# Altium PCB FastTrig_board.PcbDoc
Units mm, origin at the board's own origin, x right, y up, seen from the top; angles counter-clockwise.
Board outline 130 x 120 mm, 3 copper layers (Top Layer, Mid-Layer 1, Bottom Layer); 69 components, 65 nets, 427 pads, 118 vias.
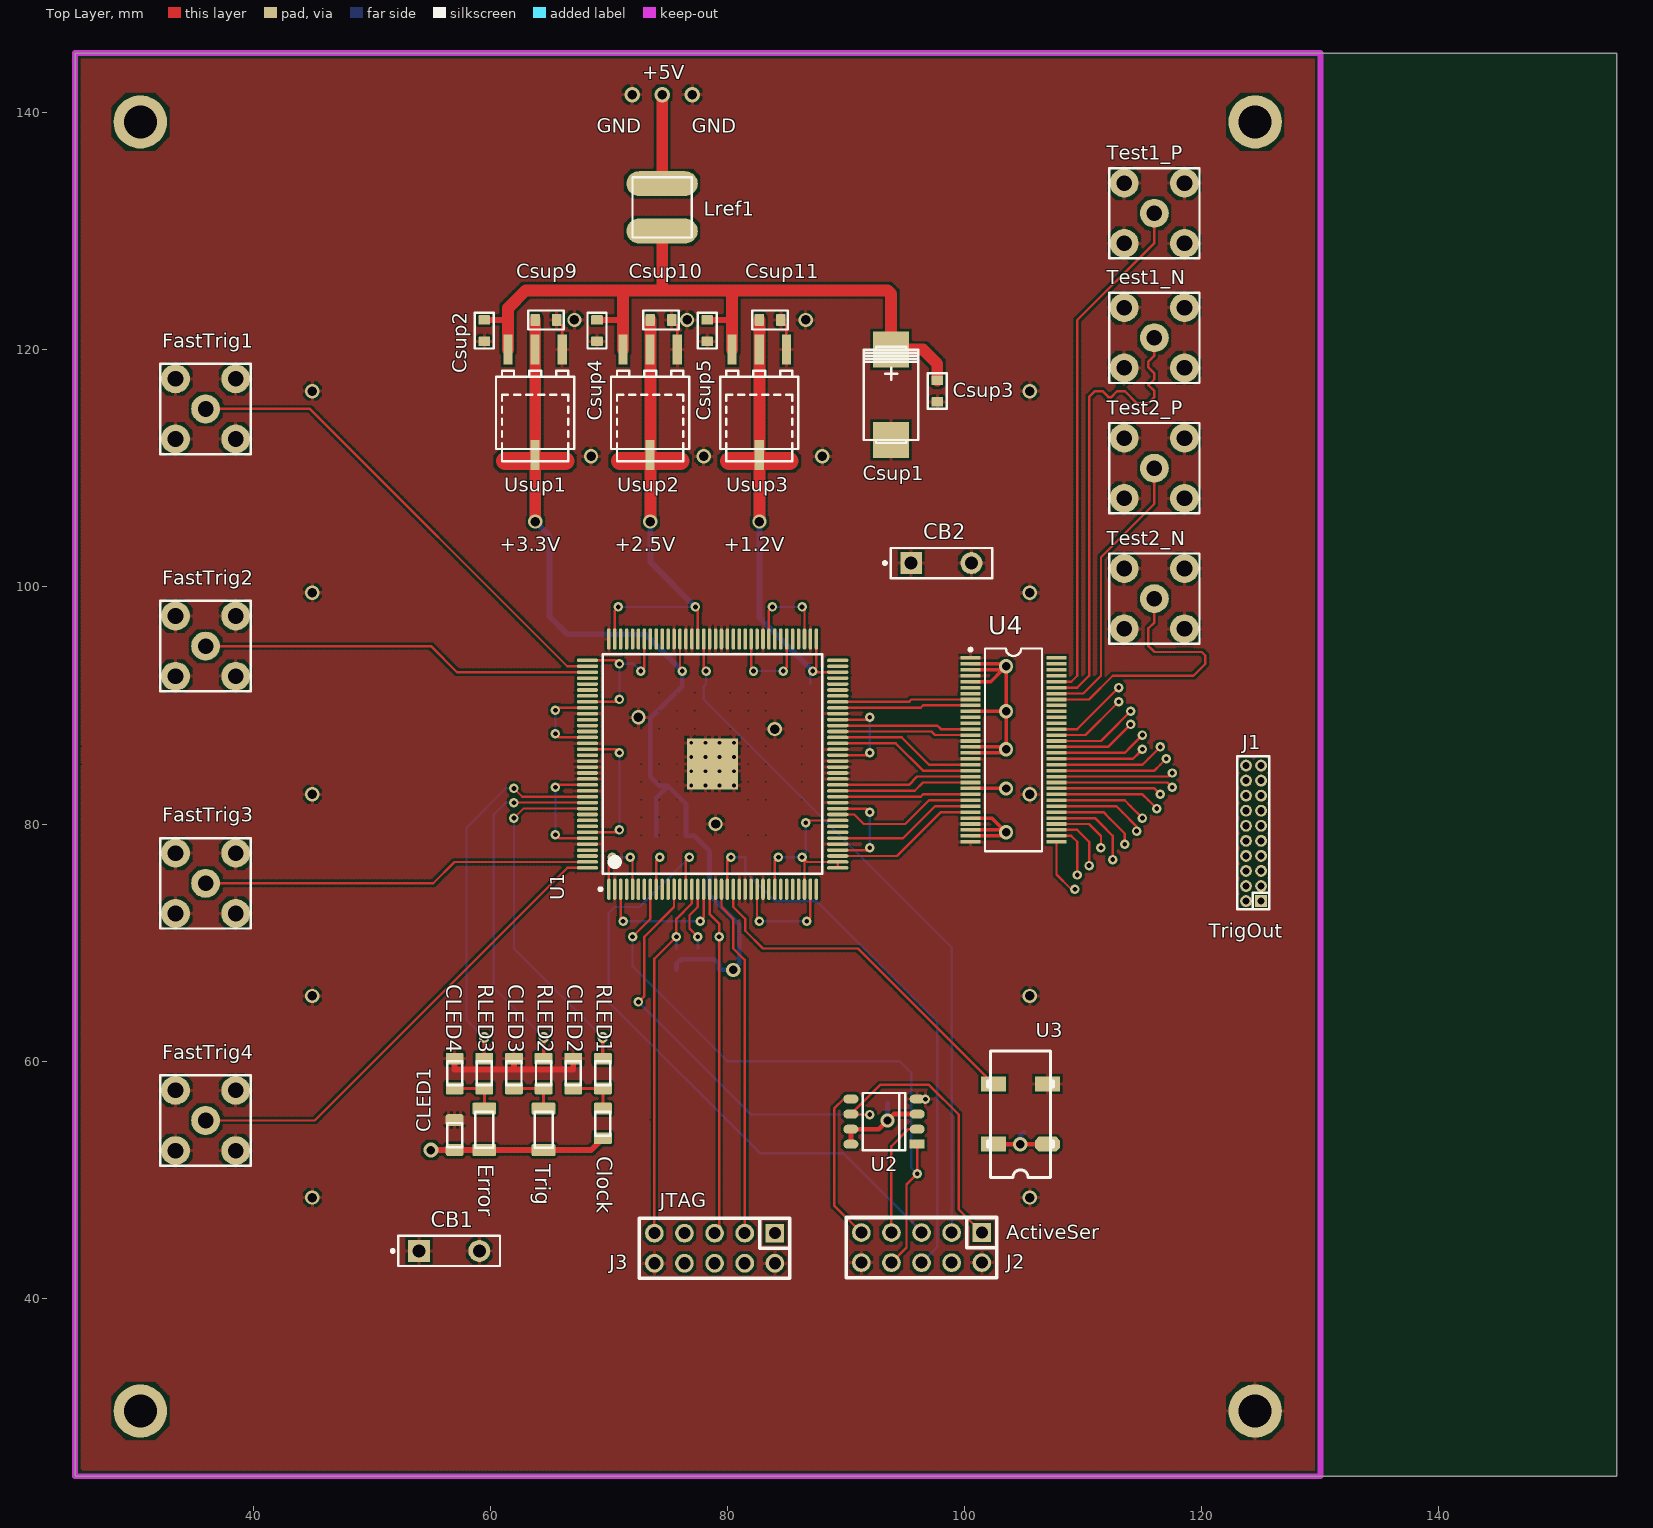
[diagram p0: Top Layer view]
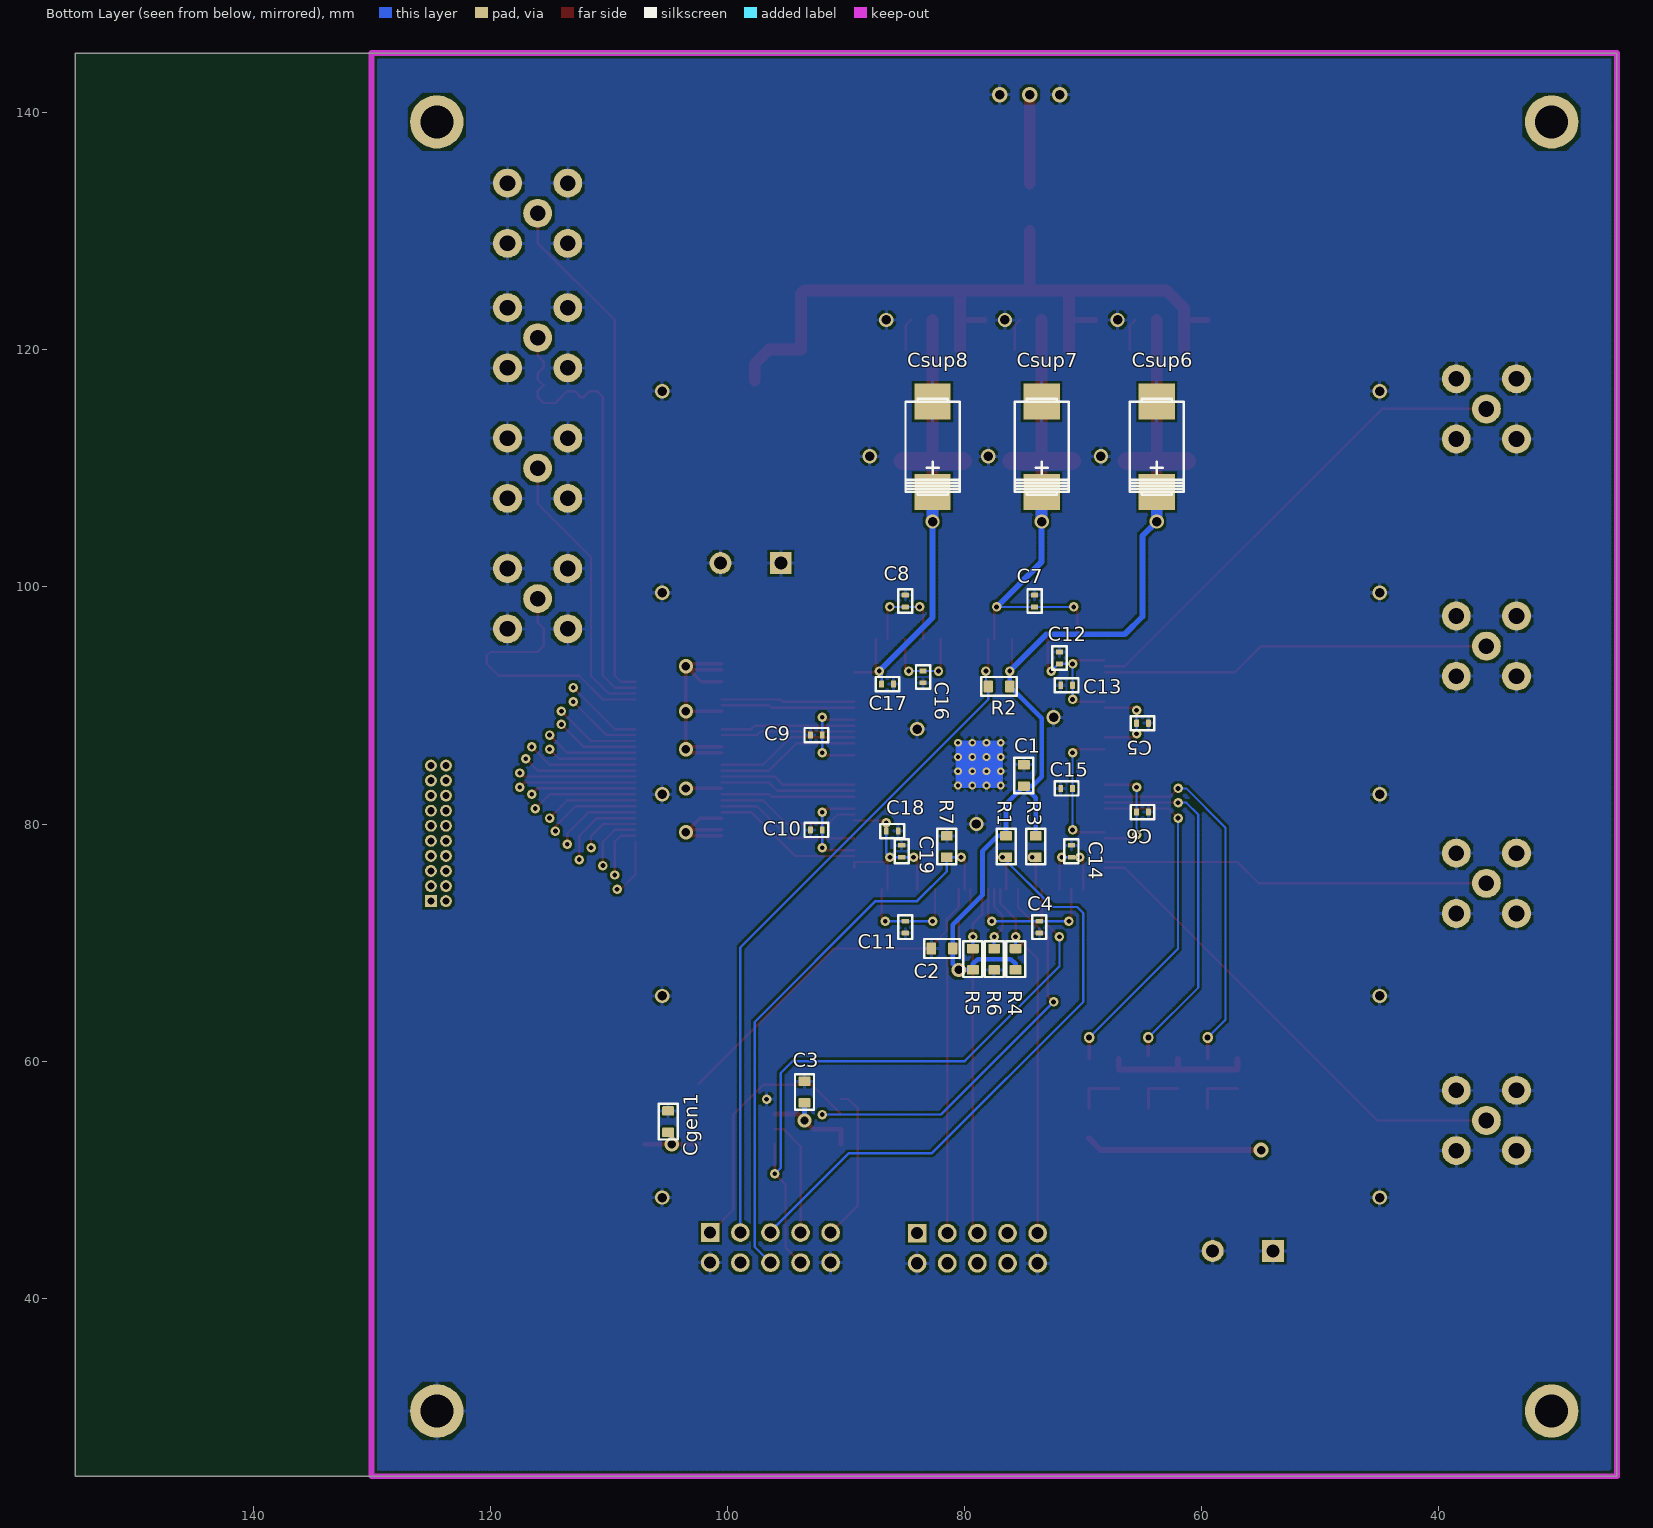
[diagram p1: Bottom Layer view, seen from below]
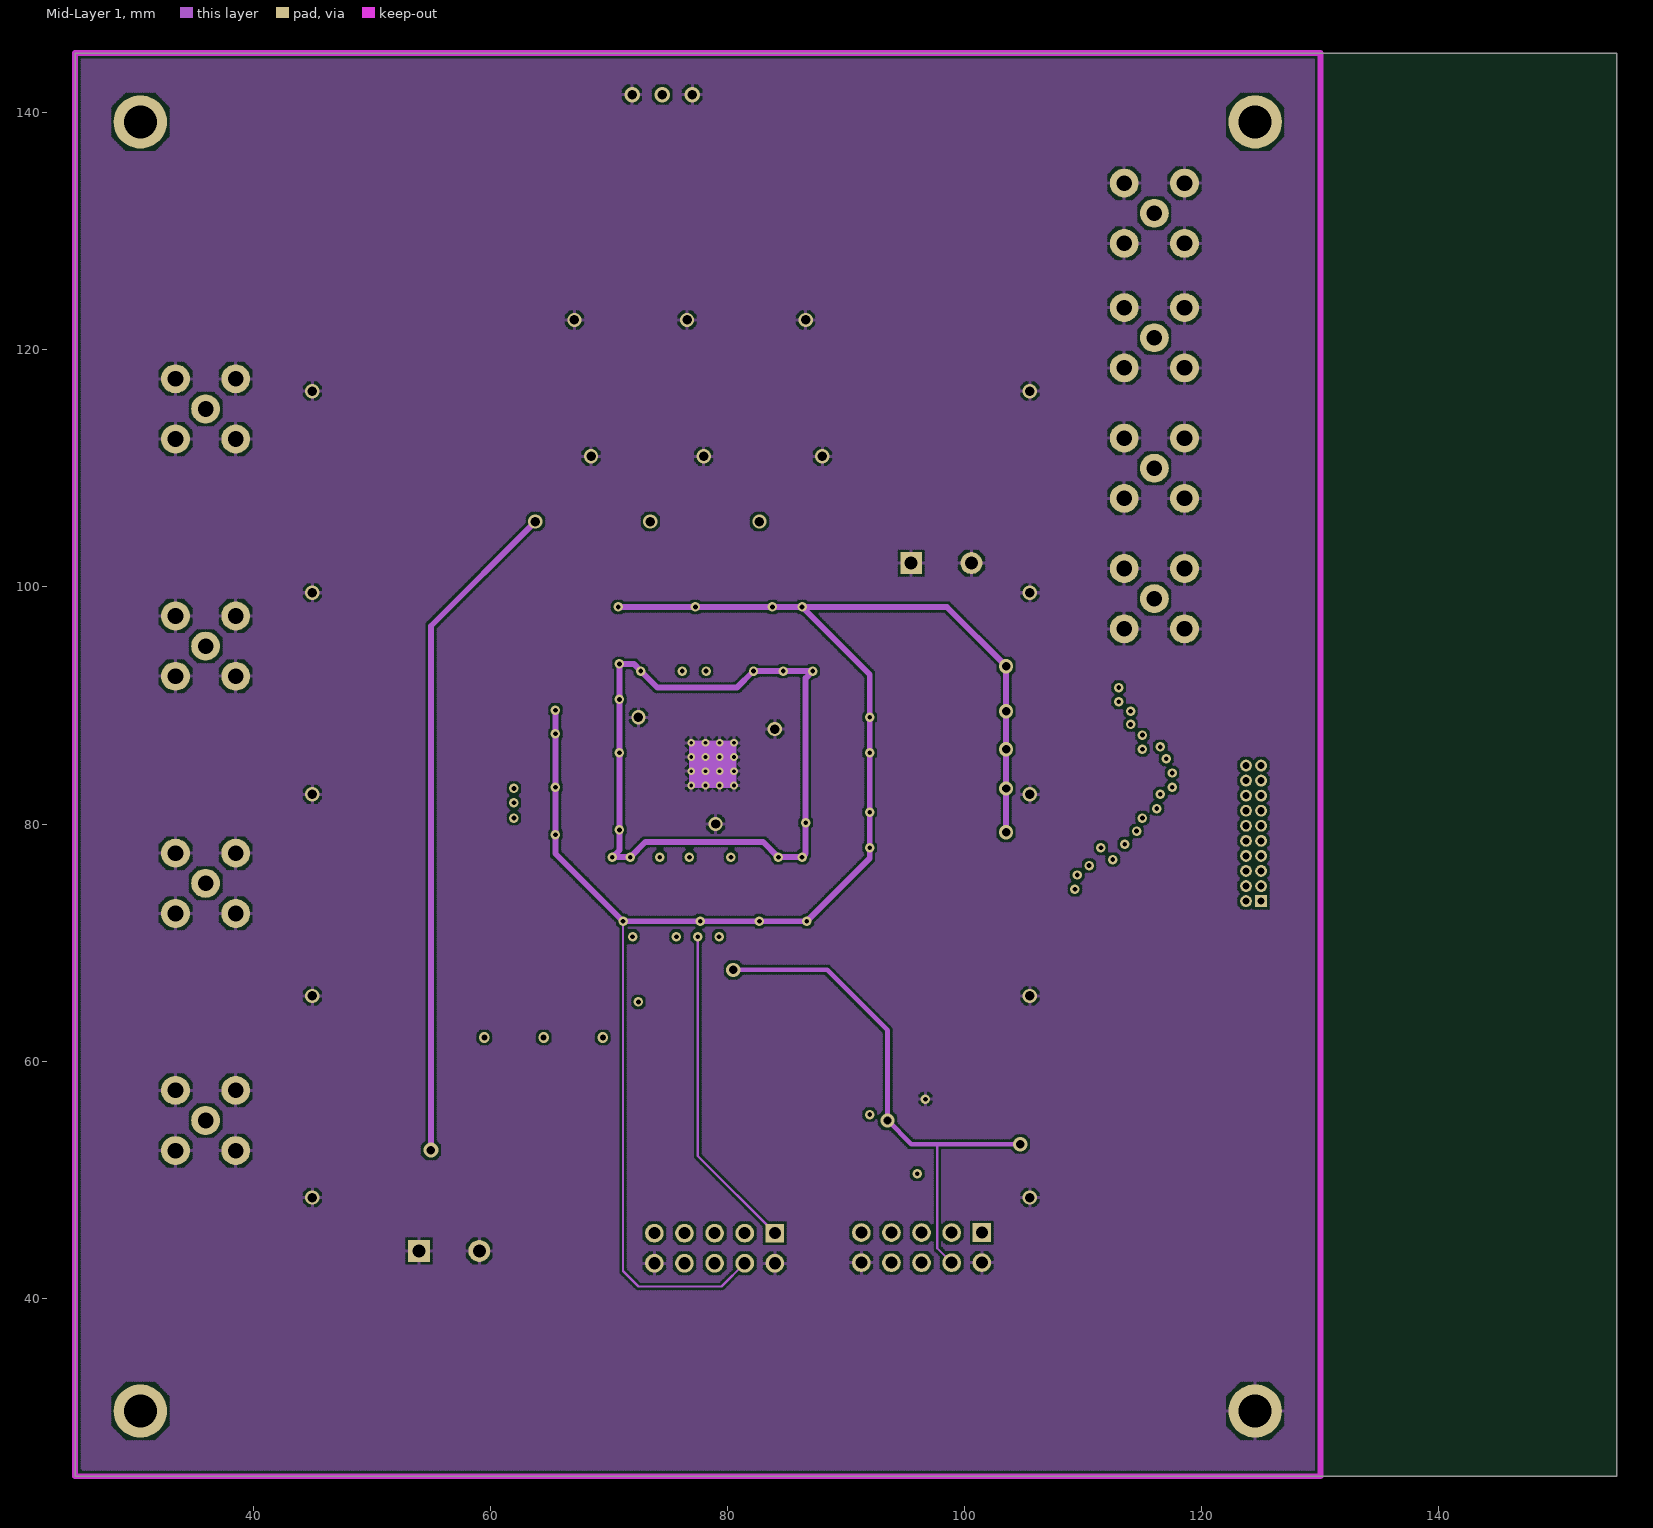
[diagram p2: Mid-Layer 1]

## Layer stack, top to bottom
Top Layer: signal copper 0.0356
Dielectric: core 0.32, FR-4, Dk 4.8
Mid-Layer 1: signal copper 0.0356
Dielectric: prepreg 0.32, FR-4, Dk 4.8
Bottom Layer: signal copper 0.0356

## Board outline
25,25 25,145 155,145 155,25

## Design rules (kind name [scope] priority, off if disabled: settings)
Clearance [All] p1: gap=0.2
DiffPairsRouting [All] p1: maxlimit=0.5 minlimit=0.15 mostfreqgap=0.2 maxuncoupledlength=12.7
PolygonConnect [All] p1: connectstyle=Relief reliefconductorwidth=0.254 reliefentries=4 polygonreliefangle="90 Angle"
RoomDefinition FastTrig_Board [InComponentClass('FastTrig_Board')] p1: confinementstyle=ConfineIn formatcopy=TRUE lockcomponents=FALSE outline 156,25 233.978,25 233.978,80.626 156,80.626
RoutingVias [All] p1: holewidth=0.4 width=0.8 viastyle="Through Hole" minholewidth=0.25 minwidth=0.5 maxholewidth=1.5 maxwidth=2
SilkscreenOverComponentPads [All] p1: minsilkscreentomaskgap=0.254
SolderMaskExpansion [All] p1: expansion=0.102
Width [All] p1: maxlimit=1.5 minlimit=0.15 preferedwidth=0.2 minimp=50.000000 maximp=50.000000 favimp=50.000000
26 further rules are at their usual default settings.

## Classes and differential pairs
differential pair TRIGOUT1: +TRIGOUT1_P -TRIGOUT1_N
differential pair TRIGOUT2: +TRIGOUT2_P -TRIGOUT2_N
differential pair TRIGOUT3: +TRIGOUT3_P -TRIGOUT3_N
differential pair TRIGOUT4: +TRIGOUT4_P -TRIGOUT4_N
differential pair TRIGOUT5: +TRIGOUT5_P -TRIGOUT5_N
differential pair TRIGOUT6: +TRIGOUT6_P -TRIGOUT6_N
differential pair TRIGOUT7: +TRIGOUT7_P -TRIGOUT7_N
differential pair TEST1: +TEST1_P -TEST1_N
differential pair TEST2: +TEST2_P -TEST2_N
differential pair TRIGOUT8: +TRIGOUT8_P -TRIGOUT8_N
differential pair TRIGOUT9: +TRIGOUT9_P -TRIGOUT9_N
differential pair TRIGOUT10: +TRIGOUT10_P -TRIGOUT10_N

## Components (designator, comment, footprint, x,y, rotation, side; value= is the part's Value field where it differs from the comment)
C1 "0.1uF" chip0603 75,85 r270 bottom
C2 "0.1uF" chip0603 82.8,69.5 r180 bottom
C3 "2.2uF" chip0603 93.5,56.5 r90 bottom
C4 "0.1uF" chip0402 73.7,70.8 r90 bottom
C5 "0.1uF" chip0402 64.5,88.5 r0 bottom
C6 "0.1uF" chip0402 64.5,81 r0 bottom
C7 "0.1uF" chip0402 74.1,99.3 r270 bottom
C8 "0.1uF" chip0402 85,99.3 r270 bottom
C9 "0.1uF" chip0402 93,87.5 r180 bottom
C10 "0.1uF" chip0402 93,79.5 r180 bottom
C11 "0.1uF" chip0402 85,70.8 r90 bottom
C12 "0.1uF" chip0402 72,94.5 r270 bottom
C13 "0.1uF" chip0402 71.9,91.7 r180 bottom
C14 "0.1uF" chip0402 71,78.2 r270 bottom
C15 "0.1uF" chip0402 71.9,83 r180 bottom
C16 "0.1uF" chip0402 83.5,91.9 r90 bottom
C17 "0.1uF" chip0402 86,91.8 r0 bottom
C18 "0.1uF" chip0402 85.6,79.4 r0 bottom
C19 "0.1uF" chip0402 85.3,78.2 r270 bottom
CB1 "Circuit Breaker" SPST-2 56.54,44 r0 top
CB2 "Circuit Breaker" SPST-2 98.04,102 r0 top (schematic designator CB1)
Cgen1 "0.1uF" chip0603 105,55.8 r270 bottom
CLED1 "0.1M" chip0805#1 57,52.5 r90 top
CLED2 "0.1M" chip0805#2 67,57.706 r90 top
CLED3 "0.1M" chip0805#2 62,57.706 r90 top
CLED4 "0.1M" chip0805#2 57,57.706 r90 top
Clock "LED" CHIP0805 69.5,56 r270 top (schematic designator VDLED2)
Csup1 "100uF" CEL-SMD300 93.8,120 r270 top
Csup2 "0.47uF" chip0603 59.5,122.5 r270 top
Csup3 "0.47uF" chip0603 97.7,117.4 r270 top
Csup4 "0.47uF" chip0603 69,122.5 r270 top
Csup5 "0.47uF" chip0603 78.3,122.5 r270 top
Csup6 "100uF" CEL-SMD300 63.8,108 r90 bottom
Csup7 "100uF" CEL-SMD300 73.5,108 r90 bottom
Csup8 "100uF" CEL-SMD300 82.7,108 r90 bottom
Csup9 "0.47uF" chip0603 63.8,122.5 r0 top
Csup10 "0.47uF" chip0603 73.5,122.5 r0 top
Csup11 "0.47uF" chip0603 82.7,122.5 r0 top
Error "LED" CHIP1206 59.5,56 r270 top (schematic designator VDLED3)
FastTrig1 "LEMO" LEMO 36,115 r90 top
FastTrig2 "LEMO" LEMO 36,95 r90 top
FastTrig3 "LEMO" LEMO 36,75 r90 top
FastTrig4 "LEMO" LEMO 36,55 r90 top
J1 "TrigOut" IDC-20_2x10_1.27 125,73.5 r90 top
J2 "ActiveSer" IDC10 101.45,45.55 r180 top
J3 "JTAG" IDC10 84,45.5 r180 top
Lref1 "100mkH" SDR0604 74.5,132 r270 top
R1 "10k" chip0603 76.5,79 r270 bottom
R2 "10k" chip0603 76.2,91.6 r0 bottom
R3 "10k" chip0603 74,79 r270 bottom
R4 "10k" chip0603 75.7,67.7 r90 bottom
R5 "10k" chip0603 79.3,67.7 r90 bottom
R6 "1k" chip0603 77.5,67.7 r90 bottom
R7 "10k" chip0603 81.5,77.2 r90 bottom
RLED1 "200" chip0805#2 69.5,57.706 r90 top
RLED2 "300" chip0805#2 64.5,57.706 r90 top
RLED3 "300" chip0805#2 59.5,57.706 r90 top
Test1_N "LEMO" LEMO 116,121 r0 top
Test1_P "LEMO" LEMO 116,131.5 r0 top
Test2_N "LEMO" LEMO 116,99 r0 top
Test2_P "LEMO" LEMO 116,110 r0 top
Trig "LED" CHIP1206 64.5,56 r270 top (schematic designator VDLED1)
U1 "EP3C16E144C8N" EQFP144_N 78.75,85.05 r90 top
U2 "EPCS4SI8" 8SO200 96,53 r90 top
U3 "40MHz" SG-636 107,53 r180 top
U4 "SN65LVDS387" DGG064 104.125,86.25 r270 top
Usup1 "NCP1117-3.3V" TO-252 63.786,120 r180 top
Usup2 "LD1117-2.5V" TO-252 73.486,120 r180 top
Usup3 "LD1117-1.2" TO-252 82.686,120 r180 top

## Footprints (in the part's own frame and the unit in brackets; to place one, negate y for a bottom-side part, rotate by r counter-clockwise, add the part's x,y. Pads: shape width x height; smd on the part's side, far side on the other; paste and mask are expansions set on the pad)
8SO200 [mil]
  rect 30x50 smd: 1(0,0)
  oval 30x50 smd: 2(50,0) 3(100,0) 4(150,0) 5(150,220) 6(100,220) 7(50,220) 8(0,220)
  silkscreen extent -20,40 170,180
CEL-SMD300 [mil]
  rect 120x120 smd: +(0,0) -(300,0)
  silkscreen extent -10,-90 310,90
chip0402 [mm]
  rrect20% 0.4x0.6 smd: 1(0,0) 2(1,0)
  silkscreen extent -0.5,-0.6 1.5,0.6
chip0603 [mm]
  rrect20% 0.8x1 smd: 1(0,0) 2(1.8,0)
  silkscreen extent -0.6,-0.8 2.4,0.8
chip0805#1 [mil]
  oval 20x60 smd: 1(-10,0) 1(0,0) 1(10,0) 2(90,0) 2(100,0) 2(110,0)
  oval 40x20 smd: 1(0,20) 1(0,-20) 2(100,-20) 2(100,20)
  silkscreen extent 10,-25 90,25
chip0805#2 [mil]
  rrect20% 39.37x59.06 smd: 1(0,0) 2(98.43,0)
  silkscreen extent 10,-25 90,25
CHIP0805 [mm]
  rrect20% 1x1.5 smd: 1(0,0) 2(2.5,0)
  silkscreen extent 0.25,-0.63 2.29,0.64
CHIP1206 [mm]
  rrect20% 1x2 smd: 1(0,0) 2(3.5,0)
  silkscreen extent 0.25,-0.76 3.3,0.76
DGG064 [mm] "Shrink Small Outline; 64 Leads; Body Width 6.1 mm; Pitch 0.5 mm"
  rect 0.3x1.65 smd: 1(-7.75,-3.625) 2(-7.25,-3.625) 3(-6.75,-3.625) 4(-6.25,-3.625) 5(-5.75,-3.625) 6(-5.25,-3.625) 7(-4.75,-3.625) 8(-4.25,-3.625) 9(-3.75,-3.625) 10(-3.25,-3.625) 11(-2.75,-3.625) 12(-2.25,-3.625) 13(-1.75,-3.625) 14(-1.25,-3.625) 15(-0.75,-3.625) 16(-0.25,-3.625) 17(0.25,-3.625) 18(0.75,-3.625) 19(1.25,-3.625) 20(1.75,-3.625) 21(2.25,-3.625) 22(2.75,-3.625) 23(3.25,-3.625) 24(3.75,-3.625) 25(4.25,-3.625) 26(4.75,-3.625) 27(5.25,-3.625) 28(5.75,-3.625) 29(6.25,-3.625) 30(6.75,-3.625) 31(7.25,-3.625) 32(7.75,-3.625) 33(7.75,3.625) 34(7.25,3.625) 35(6.75,3.625) 36(6.25,3.625) 37(5.75,3.625) 38(5.25,3.625) 39(4.75,3.625) 40(4.25,3.625) 41(3.75,3.625) 42(3.25,3.625) 43(2.75,3.625) 44(2.25,3.625) 45(1.75,3.625) 46(1.25,3.625) 47(0.75,3.625) 48(0.25,3.625) 49(-0.25,3.625) 50(-0.75,3.625) 51(-1.25,3.625) 52(-1.75,3.625) 53(-2.25,3.625) 54(-2.75,3.625) 55(-3.25,3.625) 56(-3.75,3.625) 57(-4.25,3.625) 58(-4.75,3.625) 59(-5.25,3.625) 60(-5.75,3.625) 61(-6.25,3.625) 62(-6.75,3.625) 63(-7.25,3.625) 64(-7.75,3.625)
  silkscreen extent -8.57,-3.75 8.55,2.4
EQFP144_N [mm] "Thin QFP, 144-Leads, Body 20x20mm, Pitch 0.5mm, IPC Medium Density"
  oval 1.8x0.3 smd: 1(-10.55,8.75) 2(-10.55,8.25) 3(-10.55,7.75) 4(-10.55,7.25) 5(-10.55,6.75) 6(-10.55,6.25) 7(-10.55,5.75) 8(-10.55,5.25) 9(-10.55,4.75) 10(-10.55,4.25) 11(-10.55,3.75) 12(-10.55,3.25) 13(-10.55,2.75) 14(-10.55,2.25) 15(-10.55,1.75) 16(-10.55,1.25) 17(-10.55,0.75) 18(-10.55,0.25) 19(-10.55,-0.25) 20(-10.55,-0.75) 21(-10.55,-1.25) 22(-10.55,-1.75) 23(-10.55,-2.25) 24(-10.55,-2.75) 25(-10.55,-3.25) 26(-10.55,-3.75) 27(-10.55,-4.25) 28(-10.55,-4.75) 29(-10.55,-5.25) 30(-10.55,-5.75) 31(-10.55,-6.25) 32(-10.55,-6.75) 33(-10.55,-7.25) 34(-10.55,-7.75) 35(-10.55,-8.25) 36(-10.55,-8.75) 73(10.55,-8.75) 74(10.55,-8.25) 75(10.55,-7.75) 76(10.55,-7.25) 77(10.55,-6.75) 78(10.55,-6.25) 79(10.55,-5.75) 80(10.55,-5.25) 81(10.55,-4.75) 82(10.55,-4.25) 83(10.55,-3.75) 84(10.55,-3.25) 85(10.55,-2.75) 86(10.55,-2.25) 87(10.55,-1.75) 88(10.55,-1.25) 89(10.55,-0.75) 90(10.55,-0.25) 91(10.55,0.25) 92(10.55,0.75) 93(10.55,1.25) 94(10.55,1.75) 95(10.55,2.25) 96(10.55,2.75) 97(10.55,3.25) 98(10.55,3.75) 99(10.55,4.25) 100(10.55,4.75) 101(10.55,5.25) 102(10.55,5.75) 103(10.55,6.25) 104(10.55,6.75) 105(10.55,7.25) 106(10.55,7.75) 107(10.55,8.25) 108(10.55,8.75)
  oval 0.3x1.8 smd: 37(-8.75,-10.55) 38(-8.25,-10.55) 39(-7.75,-10.55) 40(-7.25,-10.55) 41(-6.75,-10.55) 42(-6.25,-10.55) 43(-5.75,-10.55) 44(-5.25,-10.55) 45(-4.75,-10.55) 46(-4.25,-10.55) 47(-3.75,-10.55) 48(-3.25,-10.55) 49(-2.75,-10.55) 50(-2.25,-10.55) 51(-1.75,-10.55) 52(-1.25,-10.55) 53(-0.75,-10.55) 54(-0.25,-10.55) 55(0.25,-10.55) 56(0.75,-10.55) 57(1.25,-10.55) 58(1.75,-10.55) 59(2.25,-10.55) 60(2.75,-10.55) 61(3.25,-10.55) 62(3.75,-10.55) 63(4.25,-10.55) 64(4.75,-10.55) 65(5.25,-10.55) 66(5.75,-10.55) 67(6.25,-10.55) 68(6.75,-10.55) 69(7.25,-10.55) 70(7.75,-10.55) 71(8.25,-10.55) 72(8.75,-10.55) 109(8.75,10.55) 110(8.25,10.55) 111(7.75,10.55) 112(7.25,10.55) 113(6.75,10.55) 114(6.25,10.55) 115(5.75,10.55) 116(5.25,10.55) 117(4.75,10.55) 118(4.25,10.55) 119(3.75,10.55) 120(3.25,10.55) 121(2.75,10.55) 122(2.25,10.55) 123(1.75,10.55) 124(1.25,10.55) 125(0.75,10.55) 126(0.25,10.55) 127(-0.25,10.55) 128(-0.75,10.55) 129(-1.25,10.55) 130(-1.75,10.55) 131(-2.25,10.55) 132(-2.75,10.55) 133(-3.25,10.55) 134(-3.75,10.55) 135(-4.25,10.55) 136(-4.75,10.55) 137(-5.25,10.55) 138(-5.75,10.55) 139(-6.25,10.55) 140(-6.75,10.55) 141(-7.25,10.55) 142(-7.75,10.55) 143(-8.25,10.55) 144(-8.75,10.55)
  rect 4.3x4.3 smd: 145(0,0)
  silkscreen extent -10.67,-9.25 9.25,9.57, body extent -10,-10 10,10, height 1.6
IDC10 [mil]
  rect 62x62 hole 40: 1(0,0)
  round 62 hole 40: 2(0,100) 3(100,0) 4(100,100) 5(200,0) 6(200,100) 7(300,0) 8(300,100) 9(400,0) 10(400,100)
  silkscreen extent -50,-50 450,150
IDC-20_2x10_1.27 [mm]
  rect 1x1 hole 0.6: 1(0,0)
  round 1 hole 0.6: 2(0,1.27) 3(1.27,0) 4(1.27,1.27) 5(2.54,0) 6(2.54,1.27) 7(3.81,0) 8(3.81,1.27) 9(5.08,0) 10(5.08,1.27) 11(6.35,0) 12(6.35,1.27) 13(7.62,0) 14(7.62,1.27) 15(8.89,0) 16(8.89,1.27) 17(10.16,0) 18(10.16,1.27) 19(11.43,0) 20(11.43,1.27)
  silkscreen extent -0.7,-0.7 12.2,2
LEMO [mil]
  round 96 hole 52: SHIELD(-100,-100) SHIELD(-100,100) SHIELD(100,-100) SHIELD(100,100) WIRE(0,0)
  silkscreen extent -150,-150 150,150
SDR0604 [mm]
  oval 2.1x6 smd: 1(-2,0) 2(2,0)
  silkscreen extent -2.55,-2.5 2.55,2.5
SG-636 [mil]
  oct 83x50 smd: 1(0,0)
  rect 83x50 smd: 2(0,-200) 3(180,-200) 4(180,0)
  silkscreen extent -20,-310 200,110
SPST-2 [mm] "Switch; 2 Leads"
  rect 1.85x1.85 hole 1.1: 1(-2.54,0)
  round 1.85 hole 1.1: 2(2.54,0)
  silkscreen extent -4.89,-1.27 4.28,1.27
TO-252 [mil]
  rect 30x100 smd: 1(-90,0) 2(0,0) 3(90,0) 4(0,350)
  Top Layer lines w60: 100,370 0,370 -0.55,370 -100,370
  silkscreen extent -130,70 130,370

## Part data
C1 C2 C3 C4 C5 C6 C7 C8 C9 C10 C11 C12 C13 C14 C15 C16 C17 C18 C19 Cgen1 CLED1 CLED2 CLED3 CLED4 Csup2 Csup3 Csup4 Csup5 Csup9 Csup10 Csup11: library part C
Clock Error Trig: library part AL307
Csup1 Csup6 Csup7 Csup8: library part "C POL"
J1: library part IDC-20_2x10_1.27
J2 J3: library part IDC-10
Lref1: library part DR
R1 R2 R3 R4 R5 R6 R7 RLED1 RLED2 RLED3: library part R
U1: "Cyclone III Family FPGA, 84 I/O Pins, 4 PLLs, 144-Pin EQFP, Speed Grade 8, Commercial Grade, Pb-Free"
U2: "EPCS4 Series, In-system programmable 3.3V serial configuration device, 8-Pin SOIC, 4-Megabit, Industrial Grade"
U3: library part SG-636, "Crystal Oscillator (SMD)"
Usup2 Usup3: library part NCP1117-3.3V

## Free pads (board coordinates)
  round 4.5 hole 2.8: 4(30.5,30.5) 4(30.5,139.2) 4(124.5,30.5) 4(124.5,139.2)

## Via types
v1: diameter 0.8, hole 0.4, Top Layer to Bottom Layer, 65 vias
v2: diameter 1.2, hole 0.8, Top Layer to Bottom Layer, 22 vias
v3: diameter 0.66, hole 0.33, Top Layer to Bottom Layer, tented top, 16 vias
v4: diameter 1.2, hole 0.7, Top Layer to Bottom Layer, 8 vias
v5: diameter 1.3, hole 0.8, Top Layer to Bottom Layer, 3 vias
v6: diameter 0.9, hole 0.5, Top Layer to Bottom Layer, tented top, 3 vias
v7: diameter 1.27, hole 0.711, Top Layer to Bottom Layer, 1 vias

## Nets (pads, with @x,y where several pads share a name; then routed paths per layer and width w, separated by ;. In a path a pad name is that pad's centre, name@x,y a point inside that pad or via, vN(x,y) a via of type N, cw(c..) or ccw(c..) an arc to the next point about the centre after c; other vN are vias at no path point)
"+1.2 V": C12.2 C13.2 C14.2 C15.2 C16.2 C17.2 C18.2 C19.2 Csup8.+ Csup11.1 U1.1 U1.5 U1.29 U1.34 U1.37 U1.38 U1.45 U1.70 U1.73 U1.78 U1.84 U1.102 U1.109 U1.116 U1.124 U1.138 Usup3.2 Usup3.4 | length 165.1
  Top Layer w0.2: U1.138 70.7,79.3 v1(70.9,79.5) ; U1.124 70.6,86.3 v1(70.9,86) ; U1.116 70.7,90.3 v1(70.9,90.5) ; U1.109 70.6,93.8 v1(70.9,93.5) ; U1.1 70,76.9 v1(70.3,77.2) ; v1(71.8,77.2) 72,77 U1.5 ; v1(72.7,92.9) 73,93.2 U1.102 ; U1.84 82,93.1 v1(82.2,92.9) ; U1.29 84,76.9 v1(84.3,77.2) ; v1(84.7,92.9) 85,93.2 U1.78 ; v1(86.3,77.2) v1@86.5,77 ; U1.34 v1@86.5,77 ; v1(86.6,80.1) 86.8,80.3 U1.45 ; U1.73 87.5,93.2 v1(87.2,92.9) 87.3,92.8 U1.70 ; U1.37 U1.38 86.7,76.8 v1@86.5,77
  Top Layer w1: v2(82.7,105.5) 82.7,110.602 Csup11.1
  Mid-Layer 1 w0.5: v1(70.3,77.2) 70.9,77.8 v1(70.9,79.5) v1(70.9,86) v1(70.9,90.5) v1(70.9,93.5) 72.1,93.5 v1(72.7,92.9) 74.1,91.5 80.8,91.5 v1(82.2,92.9) v1(84.7,92.9) v1(87.2,92.9) 86.6,92.3 v1(86.6,80.1) 86.6,77.5 v1(86.3,77.2) v1(84.3,77.2) 83,78.5 73.1,78.5 v1(71.8,77.2) v1(70.3,77.2)
  Bottom Layer w0.2: v1(70.3,77.2) v1(71.8,77.2) ; v1(70.9,79.5) v1(70.9,86) ; v1(70.9,90.5) v1(70.9,93.5) 72.1,93.5 v1(72.7,92.9) ; v1(82.2,92.9) v1(84.7,92.9) ; v1(84.3,77.2) 85.8,77.2 ; v1@86.1,77.5 85.8,77.2 ; v1(86.3,77.2) 85.8,77.2 ; 86.6,77.5 v1(86.6,80.1) ; C17.2 87,92.7 v1(87.2,92.9)
  Bottom Layer w0.5: v2(82.7,105.5) 82.7,97.4 v1(87.2,92.9)
  Bottom Layer w1: v2(82.7,105.5) Csup8.+
"+2.5 V": C4.2 C5.2 C6.2 C7.2 C8.2 C9.2 C10.2 C11.2 Csup7.+ Csup10.1 J3.4 U1.3 U1.17 U1.26 U1.35 U1.40 U1.47 U1.56 U1.62 U1.75 U1.81 U1.93 U1.107 U1.117 U1.122 U1.130 U1.139 U4.2 U4.3 U4.5 U4.10 U4.16 U4.17 U4.23 U4.28 U4.30 U4.31 Usup2.2 Usup2.4 | length 299.1
  Top Layer w0.2: v1(65.5,79.1) 65.8,78.8 U1.139 ; v1(65.5,83.1) 65.7,83.3 U1.130 ; v1(65.5,87.6) 65.8,87.3 U1.122 ; v1(65.5,89.6) 65.7,89.8 U1.117 ; U1.107 70.5,98 v1(70.8,98.3) ; U1.3 71,72 v1(71.2,71.8) ; v1(77.3,98.3) 77.5,98.1 U1.93 ; v1(77.7,71.8) 78,72.1 U1.17 ; U1.26 82.5,72 v1(82.7,71.8) ; U1.81 83.5,98 v1(83.8,98.3) ; v1(86.3,98.3) 86.5,98.1 U1.75 ; v1(86.7,71.8) 87,72.1 U1.35 ; U1.40 91.8,77.8 v1(92,78) ; U1.47 91.7,81.3 v1(92,81) ; U1.56 91.8,85.8 v1(92,86) ; U1.62 91.8,88.8 v1(92,89)
  Top Layer w0.3: U4.31 103.2,79 v4(103.5,79.3) v4@103.3,79.5 ; U4.30 v4@103.3,79.5 ; U4.28 102.3,80.5 v4@103.3,79.5 ; U4.23 v4(103.5,83) ; U4.17 103.2,86 v4(103.5,86.3) ; U4.16 103.3,86.5 v4(103.5,86.3) ; U4.10 v4(103.5,89.5) ; U4.5 102.2,92 v4@103.2,93 ; U4.3 v4@103.2,93 ; U4.2 103.3,93.5 v4(103.5,93.3) ; v4@103.2,93 v4(103.5,93.3) ; v4(103.5,86.3) v4(103.5,89.5) ; v4(103.5,89.5) v4(103.5,93.3)
  Top Layer w1: v2(73.5,105.5) 73.5,110.602 Csup10.1
  Mid-Layer 1 w0.2: v1(71.2,71.8) 71.2,42.3 72.5,41 79.5,41 J3.4
  Mid-Layer 1 w0.5: v1(65.5,89.6) v1(65.5,87.6) v1(65.5,83.1) v1(65.5,79.1) 65.5,77.5 v1(71.2,71.8) v1(77.7,71.8) v1(82.7,71.8) v1(86.7,71.8) 92,77.1 v1(92,78) v1(92,81) v1(92,86) v1(92,89) 92,92.6 v1(86.3,98.3) ; v1(70.8,98.3) v1(77.3,98.3) v1(83.8,98.3) v1(86.3,98.3) ; v4(103.5,79.3) v4(103.5,86.3) v4(103.5,93.3) 98.5,98.3 v1(86.3,98.3)
  Bottom Layer w0.2: v1(65.5,79.1) v1(65.5,83.1) ; v1(65.5,87.6) v1(65.5,89.6) ; v1(70.8,98.3) C7.2 v1(77.3,98.3) ; v1(71.2,71.8) v1(77.7,71.8) ; v1(82.7,71.8) v1(86.7,71.8) ; v1(83.8,98.3) C8.2 v1(86.3,98.3) ; v1(92,78) C10.2 v1(92,81) ; v1(92,86) C9.2 v1(92,89)
  Bottom Layer w0.5: v2(73.5,105.5) 73.5,102.1 v1(77.3,98.3)
  Bottom Layer w1: v2(73.5,105.5) Csup7.+
"+3.3 V": C1.2 C2.2 C3.1 Cgen1.2 CLED1.1 Csup6.+ Csup9.1 J2.4 R1.1 R2.1 R3.1 R4.1 R5.1 U1.96 U2.3 U2.7 U2.8 U3.1 U3.4 Usup1.2 Usup1.4 | length 216.5
  Top Layer w0.2: U1.96 76,93.1 v1(76.2,92.9)
  Top Layer w0.4: U2.8 U2.7 92.77,54.27 94.04,55.54 U2.3 ; U3.4 v4(104.7,53) U3.1
  Top Layer w0.5: v7(55,52.5) 68.5,52.5 69.5,53.5
  Top Layer w1: v2(63.8,105.5) 63.8,110.602 Csup9.1
  Mid-Layer 1 w0.2: 97.7,53 97.7,44.22 J2.4
  Mid-Layer 1 w0.4: v4(80.5,67.7) 88.4,67.7 93.5,62.6 v4(93.5,55) 95.5,53 97.7,53 v4(104.7,53)
  Mid-Layer 1 w0.5: v7(55,52.5) 55,96.7 v2(63.8,105.5)
  Bottom Layer w0.4: R3.1 74,82.2 C1.2 ; R4.1 75.7,68.2 76.1,68.6 78.9,68.6 79.3,68.2 R5.1 v4(80.5,67.7) 81,68.2 C2.2 81,71.5 78.5,74 78.5,77.7 77.2,79 R1.1 76.5,81.7 C1.2 ; v1(76.2,92.9) R2.1 73.5,88.9 73.5,84 74.3,83.2 C1.2 ; v4(93.5,55) C3.1 ; v4(104.7,53) 104.7,53.7 Cgen1.2
  Bottom Layer w0.5: v2(63.8,105.5) 65,104.3 65,97.5 66.5,96 73.1,96 v1(76.2,92.9)
  Bottom Layer w1: v2(63.8,105.5) Csup6.+
"+5 V": Csup1.+ Csup2.1 Csup3.1 Csup4.1 Csup5.1 Lref1.2 Usup1.3 Usup2.3 Usup3.3 | length 68
  Top Layer w0.5: Csup2.1 61.5,122.5 ; Csup4.1 71,122.5 ; Csup5.1 80.3,122.5
  Top Layer w1: Usup1.3 61.5,122.5 61.5,123.5 63,125 74.5,125 ; Usup2.3 71.2,125 ; Lref1.2 74.5,125 ; Usup3.3 80.4,125 ; Csup3.1 97.7,118.8 96.5,120 Csup1.+ 93.8,124.7 93.5,125 80.4,125 ; 74.5,125 80.4,125
"+5IN V": Lref1.1 | length 7.5
  Top Layer w1: Lref1.1 v5(74.5,141.5)
"AS ASD": J2.9 U2.5 | length 13.1
  Top Layer w0.2: U2.5 89.81,56.81 89,56 89,47.84 J2.9
"AS DATA": J2.7 U2.2 | length 10
  Top Layer w0.2: J2.7 93.83,52.83 95.27,54.27 U2.2
"AS DCLK": J2.1 U1.12 U2.6 | length 57.7
  Top Layer w0.2: v1(72.5,65) 73,65.5 73,70.5 75.5,73 U1.12 ; v1(92,55.5) 90.452,55.5 U2.6 92.872,58 97,58 99.5,55.5 99.5,47.5 J2.1
  Bottom Layer w0.2: v1(72.5,65) 82,55.5 v1(92,55.5)
"AS NCE": J2.6 R7.1 U1.21 | length 47.5
  Top Layer w0.2: U1.21 80,76.9 v1(80.3,77.2)
  Bottom Layer w0.2: v1(80.3,77.2) R7.1 81.5,76 84,73.5 87.5,73.5 97.7,63.3 97.7,44.34 J2.6
"AS NCS": J2.8 U1.8 U2.1 | length 53.9
  Top Layer w0.2: v1(72,70.5) 73.5,72 U1.8 ; J2.8 95.1,44.28 95.1,49.6 v1(96,50.5) U2.1
  Bottom Layer w0.2: v1(72,70.5) 72,68 80,60 94.5,60 95.5,59 95.5,51 v1(96,50.5)
CLK_LIGHT: RLED1.2 U1.134 | length 29.9
  Top Layer w0.175: v1(62,80.5) 62.8,81.3 U1.134
  Top Layer w0.3: RLED1.2 v6(69.5,62)
  Bottom Layer w0.175: v1(62,80.5) 62,69.5 v6(69.5,62)
CONF_DONE: J2.3 R2.2 U1.92 | length 58.9
  Top Layer w0.2: U1.92 78,93.1 v1(78.2,92.9)
  Bottom Layer w0.2: v1(78.2,92.9) 78.2,91.8 R2.2 78,90.5 98.91,69.59 J2.3
ERR_LIGHT: RLED3.2 U1.132 | length 32
  Top Layer w0.175: v1(62,83) 62.7,82.3 U1.132
  Top Layer w0.3: RLED3.2 v6(59.5,62)
  Bottom Layer w0.175: v6(59.5,62) 58,63.5 58,79.7 61.3,83 v1(62,83)
FASTTRIGDES1: FastTrig1.WIRE U1.110 | length 41.2
  Top Layer w0.2: FastTrig1.WIRE 44.8,115 66.5,93.3 U1.110
FASTTRIGDES2: FastTrig2.WIRE U1.111 | length 33.1
  Top Layer w0.2: FastTrig2.WIRE 55,95 57.2,92.8 U1.111
FASTTRIGDES3: FastTrig3.WIRE U1.143 | length 32.9
  Top Layer w0.2: FastTrig3.WIRE 55.2,75 57,76.8 U1.143
FASTTRIGDES4: FastTrig4.WIRE U1.144 | length 41
  Top Layer w0.2: FastTrig4.WIRE 45.2,55 66.5,76.3 U1.144
FQUARTZ: U1.22 U3.3 | length 30.2
  Top Layer w0.2: U1.22 80.5,73 81.5,72 81.5,71 83,69.5 91.008,69.5 U3.3
GND: C1.1 C2.1 C3.2 C4.1 C5.1 C6.1 C7.1 C8.1 C9.1 C10.1 C11.1 C12.1 C13.1 C14.1 C15.1 C16.1 C17.1 C18.1 C19.1 CB1.1 CB1.2 CB2.1 CB2.2 Cgen1.1 CLED1.2 CLED2.2 CLED3.2 CLED4.2 Csup1.- Csup2.2 Csup3.2 Csup4.2 Csup5.2 Csup6.- Csup7.- Csup8.- Csup9.2 Csup10.2 Csup11.2 FastTrig1.SHIELD FastTrig2.SHIELD FastTrig3.SHIELD FastTrig4.SHIELD J2.2 J2.10 J3.2 J3.10 pad.4@124.5,30.5 R6.1 R7.2 Test1_N.SHIELD Test1_P.SHIELD Test2_N.SHIELD Test2_P.SHIELD U1.2 U1.19 U1.23 U1.24 U1.25 U1.27 U1.41 U1.48 U1.52 U1.53 U1.54 U1.55 U1.57 U1.63 U1.74 U1.82 U1.88 U1.89 U1.90 U1.91 U1.94 U1.95 U1.97 U1.108 U1.118 U1.123 U1.126 U1.127 U1.128 U1.129 U1.131 U1.140 U1.145 U2.4 U3.2 U4.1 U4.4 U4.15 U4.18 U4.29 U4.32 Usup1.1 Usup2.1 Usup3.1 | length 128.8
  Top Layer w0.2: Csup9.2 66.072,122.028 Usup1.1 ; Csup10.2 75.772,122.028 Usup2.1 ; Csup11.2 84.972,122.028 Usup3.1
  Top Layer w0.5: CLED4.2@57,60.2 57,59.3 62,59.3 ; CLED3.2@62,60.2 62,59.3 ; CLED2.2 67,59.3 62,59.3
  Mid-Layer 1 w0.4: v3@77.25,83.25 v3@77.25,86.85 ; 77.55,83.25 77.55,86.85 ; v3@77.85,83.25 v3@77.85,86.85 ; v3(78.15,83.25) v3(78.15,86.85) ; v3@78.45,83.25 v3@78.45,86.85 ; 78.75,83.25 78.75,86.85 ; v3@79.05,83.25 v3@79.05,86.85 ; v3(79.35,83.25) v3(79.35,86.85) ; v3@79.65,83.25 v3@79.65,86.85 ; 79.95,83.25 79.95,86.85 ; v3@80.25,83.25 v3@80.25,86.85 ; v3(76.95,83.25) v3(76.95,86.85) v3(80.55,86.85) v3(80.55,83.25) v3(76.95,83.25)
  Bottom Layer w0.4: v3@77.25,83.25 v3@77.25,86.85 ; 77.55,83.25 77.55,86.85 ; v3@77.85,83.25 v3@77.85,86.85 ; v3(78.15,83.25) v3(78.15,86.85) ; v3@78.45,83.25 v3@78.45,86.85 ; 78.75,83.25 78.75,86.85 ; v3@79.05,83.25 v3@79.05,86.85 ; v3(79.35,83.25) v3(79.35,86.85) ; v3@79.65,83.25 v3@79.65,86.85 ; 79.95,83.25 79.95,86.85 ; v3@80.25,83.25 v3@80.25,86.85 ; v3(76.95,83.25) v3(76.95,86.85) v3(80.55,86.85) v3(80.55,83.25) v3(76.95,83.25)
  other v1: 96.7,56.8
  other v2: 45,48.5 105.5,48.5 45,65.5 105.5,65.5 79,80 45,82.5 105.5,82.5 84,88 72.5,89 45,99.5 105.5,99.5 68.5,111 78,111 88,111 45,116.5 105.5,116.5 67.1,122.5 76.6,122.5 86.6,122.5
  other v3: 76.95,84.45 78.15,84.45 79.35,84.45 80.55,84.45 76.95,85.65 78.15,85.65 79.35,85.65 80.55,85.65
  other v5: 71.96,141.5 77.04,141.5
NCONFIG: J2.5 R1.2 U1.14 | length 53.5
  Top Layer w0.2: U1.14 76.5,76.9 v1(76.8,77.2)
  Bottom Layer w0.2: v1(76.8,77.2) 72.6,73 70.5,73 70,72.5 70,65 82.778,52.222 89.778,52.222 96.37,45.63 J2.5
NetCLED2_1: CLED2.1 RLED1.1 | length 4.2
  Top Layer w0.254: CLED2.1 RLED1.1 69.5,56
NetCLED3_1: CLED3.1 RLED2.1 | length 4.2
  Top Layer w0.254: CLED3.1 RLED2.1 64.5,56
NetCLED4_1: CLED4.1 RLED3.1 | length 4.2
  Top Layer w0.254: CLED4.1 RLED3.1 59.5,56
NSTATUS: R3.2 U1.9 | length 2.8
  Top Layer w0.2: U1.9 74,76.9 v1(74.3,77.2)
TCK: J3.1 R6.2 U1.16 | length 33.3
  Top Layer w0.2: v1(77.5,70.5) 76.8,71.2 76.8,72.3 77.5,73 U1.16
  Mid-Layer 1 w0.2: v1(77.5,70.5) 77.5,52 J3.1
  Bottom Layer w0.254: R6.2 v1(77.5,70.5)
TDI: J3.9 R4.2 U1.15 | length 31.3
  Top Layer w0.2: J3.9 73.84,68.64 v1(75.7,70.5) 75.7,72 77,73.3 U1.15
  Bottom Layer w0.254: R4.2 v1(75.7,70.5)
TDO: J3.3 U1.20 | length 29.8
  Top Layer w0.2: U1.20 79.5,73 80.5,72 80.5,69.5 81.46,68.54 J3.3
TEST1: U1.65 U4.8 | length 11.3
  Top Layer w0.2: U1.65 95.3,90.3 95.5,90.5 U4.8
TEST1_N: Test1_N.WIRE U4.59 | length 39.2
  Top Layer w0.2: U4.59 109.5,91.5 110.5,92.5 110.5,116 111,116.5 111.625,116.5 112.125,116 112.375,116 112.875,116.5 113.5,116.5 114.5,115.5 115.5,115.5 116,116 116,116.5 115.5,117 116,117.5 116,118 115.5,118.5 115.5,119 116,119.5 Test1_N.WIRE
TEST1_P: Test1_P.WIRE U4.60 | length 43.6
  Top Layer w0.2: U4.60 109,92 109.5,92.5 109.5,122.5 116,129 Test1_P.WIRE
TEST2: U1.64 U4.9 | length 11.3
  Top Layer w0.2: U1.64 96.3,89.8 96.5,90 U4.9
TEST2_N: Test2_N.WIRE U4.57 | length 23.8
  Top Layer w0.2: U4.57 110.5,90.5 112.5,92.5 119.3,92.5 120.3,93.5 120.3,94.2 120,94.5 116,94.5 115.5,95 115.5,96.5 116,97 Test2_N.WIRE
TEST2_P: Test2_P.WIRE U4.58 | length 23.7
  Top Layer w0.2: U4.58 110,91 111.5,92.5 111.5,102.5 116,107 Test2_P.WIRE
TMS: J3.5 R5.2 U1.18 | length 30.5
  Top Layer w0.2: U1.18 78.5,72.4 79.3,71.6 v1(79.3,70.5) 79.3,45.88 J3.5
  Bottom Layer w0.254: R5.2 v1(79.3,70.5)
TRIG_LIGHT: RLED2.2 U1.133 | length 30.4
  Top Layer w0.175: v1(62,81.8) U1.133
  Top Layer w0.3: RLED2.2@64.5,60.5 v6(64.5,62)
  Bottom Layer w0.175: v1(62,81.8) 61.3,81.8 60.3,80.8 60.3,66.2 v6(64.5,62)
TRIGOUT1: U1.39 U4.27 | length 12.7
  Top Layer w0.2: U1.39 94.3,77.3 98,81 U4.27
TRIGOUT1_N: U4.34 | length 4.8
  Top Layer w0.2: U4.34 109,79 109.5,78.5 v1(109.5,75.7)
TRIGOUT1_P: U4.33 | length 4.8
  Top Layer w0.2: U4.33 107.75,75.75 109,74.5 v1(109.3,74.5)
TRIGOUT2: U1.42 U4.26 | length 12.3
  Top Layer w0.2: U1.42 94.8,78.8 97.5,81.5 U4.26
TRIGOUT2_N: U4.36 | length 5.2
  Top Layer w0.2: U4.36 110.5,80 111.5,79 v1(111.5,78)
TRIGOUT2_P: U4.35 | length 5.2
  Top Layer w0.2: U4.35 109.5,79.5 110.5,78.5 110.5,78 v1(110.5,76.5)
TRIGOUT3: U1.46 U4.25 | length 12.4
  Top Layer w0.2: U1.46 90.7,80.8 91.5,80 95,80 97,82 U4.25
TRIGOUT3_N: U4.38 | length 7.4
  Top Layer w0.2: U4.38 111.7,81 112.2,80.5 113.5,79.2 v1(113.5,78.3)
TRIGOUT3_P: U4.37 | length 7.4
  Top Layer w0.2: U4.37 111,80.5 111.5,80 112.5,79 v1(112.5,77)
TRIGOUT4: U1.49 U4.24 | length 11.3
  Top Layer w0.2: U1.49 96.3,82.3 96.5,82.5 U4.24
TRIGOUT4_N: U4.40 | length 7.9
  Top Layer w0.2: U4.40 113.5,82 114,81.5 v1(115,80.5)
TRIGOUT4_P: U4.39 | length 7.9
  Top Layer w0.2: U4.39 112.8,81.5 113.3,81 114.5,79.8 v1(114.5,79.4)
TRIGOUT5: U1.50 U4.22 | length 11.5
  Top Layer w0.2: U1.50 95.8,82.8 96.5,83.5 U4.22
TRIGOUT5_N: U4.42 | length 9
  Top Layer w0.2: U4.42 116,83 v1(116.5,82.5)
TRIGOUT5_P: U4.41 | length 8.9
  Top Layer w0.2: U4.41 115,82.5 115.5,82 v1(116.2,81.3)
TRIGOUT6: U1.51 U4.21 | length 11.5
  Top Layer w0.2: U1.51 95.3,83.3 96,84 U4.21
TRIGOUT6_N: U4.44 | length 9.9
  Top Layer w0.2: U4.44 117.2,84 v1(117.5,84.3)
TRIGOUT6_P: U4.43 | length 9.9
  Top Layer w0.2: U4.43 117.1,83.5 v1(117.5,83.1)
TRIGOUT7: U1.58 U4.20 | length 12.2
  Top Layer w0.2: U1.58 94.2,86.8 96.5,84.5 U4.20
TRIGOUT7_N: U4.46 | length 9.4
  Top Layer w0.2: U4.46 115,85 115.5,85.5 v1(116.5,86.5)
TRIGOUT7_P: U4.45 | length 9.7
  Top Layer w0.2: U4.45 116,84.5 116.5,85 v1(117,85.5)
TRIGOUT8: U1.59 U4.19 | length 12.2
  Top Layer w0.2: U1.59 94.7,87.3 97,85 U4.19
TRIGOUT8_N: U4.48 | length 7.9
  Top Layer w0.2: U4.48 113.5,86 114,86.5 v1(115,87.5)
TRIGOUT8_P: U4.47 | length 7.6
  Top Layer w0.2: U4.47 114.2,85.5 114.7,86 v1(115,86.3)
TRIGOUT9: U1.60 U4.14 | length 11.3
  Top Layer w0.2: U1.60 97.2,87.8 97.5,87.5 U4.14
TRIGOUT9_N: U4.50 | length 7.3
  Top Layer w0.2: U4.50 111.5,87 112,87.5 v1(114,89.5)
TRIGOUT9_P: U4.49 | length 7
  Top Layer w0.2: U4.49 112.1,86.5 112.6,87 v1(114,88.4)
TRIGOUT10: U1.61 U4.13 | length 11.3
  Top Layer w0.2: U1.61 97.7,88.3 98,88 U4.13
TRIGOUT10_N: U4.52 | length 6.3
  Top Layer w0.2: U4.52 109.5,88 v1@112.75,91.25
  other v1: 113,91.5
TRIGOUT10_P: U4.51 | length 6.1
  Top Layer w0.2: U4.51 110.2,87.5 v1@112.75,90.05
  other v1: 113,90.3
pads on no net: Clock.1 Clock.2 Error.1 Error.2 J1.1 J1.2 J1.3 J1.4 J1.5 J1.6 J1.7 J1.8 J1.9 J1.10 J1.11 J1.12 J1.13 J1.14 J1.15 J1.16 J1.17 J1.18 J1.19 J1.20 J3.6 J3.7 J3.8 Trig.1 Trig.2 U1.4 U1.6 U1.7 U1.10 U1.11 U1.13 U1.28 U1.30 U1.31 U1.32 U1.33 U1.36 U1.43 U1.44 U1.66 U1.67 U1.68 U1.69 U1.71 U1.72 U1.76 U1.77 U1.79 U1.80 U1.83 U1.85 U1.86 U1.87 U1.98 U1.99 U1.100 U1.101 U1.103 U1.104 U1.105 U1.106 U1.112 U1.113 U1.114 U1.115 U1.119 U1.120 U1.121 U1.125 U1.135 U1.136 U1.137 U1.141 U1.142 U4.6 U4.7 U4.11 U4.12 U4.53 U4.54 U4.55 U4.56 U4.61 U4.62 U4.63 U4.64

## Polygon pours and split planes (outlines as drawn)
GND on Bottom Layer "GND" (hatched 90Degree grid 0.15 track 0.175, remove dead copper, pour order 6): 25,145 130,145 130,25 25,25
GND on Top Layer "GND" (hatched 90Degree grid 0.15 track 0.175, remove dead copper, pour order 5): 25,145 130,145 130,25 25,25
GND on Mid-Layer 1 "GND" (hatched 90Degree grid 0.15 track 0.175, remove dead copper, pour order 4): 25,145 130,145 130,25 25,25

## Keep-outs
Keep-Out Layer:
  lines w0.5: 25,25 25,145 130,145 130,25 25,25

## Silkscreen, mask and mechanical layers (free items; w line width, h text height)
Top Overlay:
  text "+5V" at 72.8,142.8 h1.2
  text "GND" at 69,138.3 h1.2
  text "GND" at 77,138.3 h1.2
  text "+3.3V" at 60.8,103 h1.2
  text "+2.5V" at 70.5,103 h1.2
  text "+1.2V" at 79.7,103 h1.2
Top Solder:
  lines w0.5: 25,25 25,145 130,145 130,25 25,25
Bottom Solder:
  lines w0.5: 25,25 130,25 130,145 25,145 25,25

## Text inside footprints (layer, text, board x,y; h text height)
C1: Mechanical 3 "CHIP0603" at 74,86 h0.5 r90
C2: Mechanical 3 "CHIP0603" at 83.8,70.5 h0.5
C3: Mechanical 3 "CHIP0603" at 94.5,55.5 h0.5 r270
Cgen1: Mechanical 3 "CHIP0603" at 104,56.8 h0.5 r90
CLED1: Mechanical 3 "CHIP0805" at 58.27,52.5 h0.51 r90
CLED2: Mechanical 3 "CHIP0805" at 68.27,57.706 h0.51 r90
CLED3: Mechanical 3 "CHIP0805" at 63.27,57.706 h0.51 r90
CLED4: Mechanical 3 "CHIP0805" at 58.27,57.706 h0.51 r90
Clock: Mechanical 3 "CHIP0805" at 68.23,56 h0.51 r270
Csup1: Mechanical 3 "CEL-SMD300" at 91.768,117.968 h0.51 r270
Csup2: Mechanical 3 "CHIP0603" at 60.5,123.5 h0.5 r270
Csup3: Mechanical 3 "CHIP0603" at 98.7,118.4 h0.5 r270
Csup4: Mechanical 3 "CHIP0603" at 70,123.5 h0.5 r270
Csup5: Mechanical 3 "CHIP0603" at 79.3,123.5 h0.5 r270
Csup6: Mechanical 3 "CEL-SMD300" at 61.768,110.032 h0.51 r270
Csup7: Mechanical 3 "CEL-SMD300" at 71.468,110.032 h0.51 r270
Csup8: Mechanical 3 "CEL-SMD300" at 80.668,110.032 h0.51 r270
Csup9: Mechanical 3 "CHIP0603" at 62.8,123.5 h0.5
Csup10: Mechanical 3 "CHIP0603" at 72.5,123.5 h0.5
Csup11: Mechanical 3 "CHIP0603" at 81.7,123.5 h0.5
Error: Mechanical 3 "CHIP1206" at 57.976,56 h0.51 r270
J1: Mechanical 2 "IDC20" at 120.936,81.12 h0.51 r90
R1: Mechanical 3 "CHIP0603" at 75.5,80 h0.5 r90
R2: Mechanical 3 "CHIP0603" at 75.2,90.6 h0.5 r180
R3: Mechanical 3 "CHIP0603" at 73,80 h0.5 r90
R4: Mechanical 3 "CHIP0603" at 76.7,66.7 h0.5 r270
R5: Mechanical 3 "CHIP0603" at 80.3,66.7 h0.5 r270
R6: Mechanical 3 "CHIP0603" at 78.5,66.7 h0.5 r270
R7: Mechanical 3 "CHIP0603" at 82.5,76.2 h0.5 r270
RLED1: Mechanical 3 "CHIP0805" at 70.77,57.706 h0.51 r90
RLED2: Mechanical 3 "CHIP0805" at 65.77,57.706 h0.51 r90
RLED3: Mechanical 3 "CHIP0805" at 60.77,57.706 h0.51 r90
Trig: Mechanical 3 "CHIP1206" at 62.976,56 h0.51 r270
U2: Mechanical 2 "8SO200" at 94.984,52.238 h0.51 r180
Usup1: Mechanical 2 "TO-252" at 66.072,117.46 h0.76 r180
Usup2: Mechanical 2 "TO-252" at 75.772,117.46 h0.76 r180
Usup3: Mechanical 2 "TO-252" at 84.972,117.46 h0.76 r180